# EAGLE board esq_ordenado (EAGLE 9.6.1)
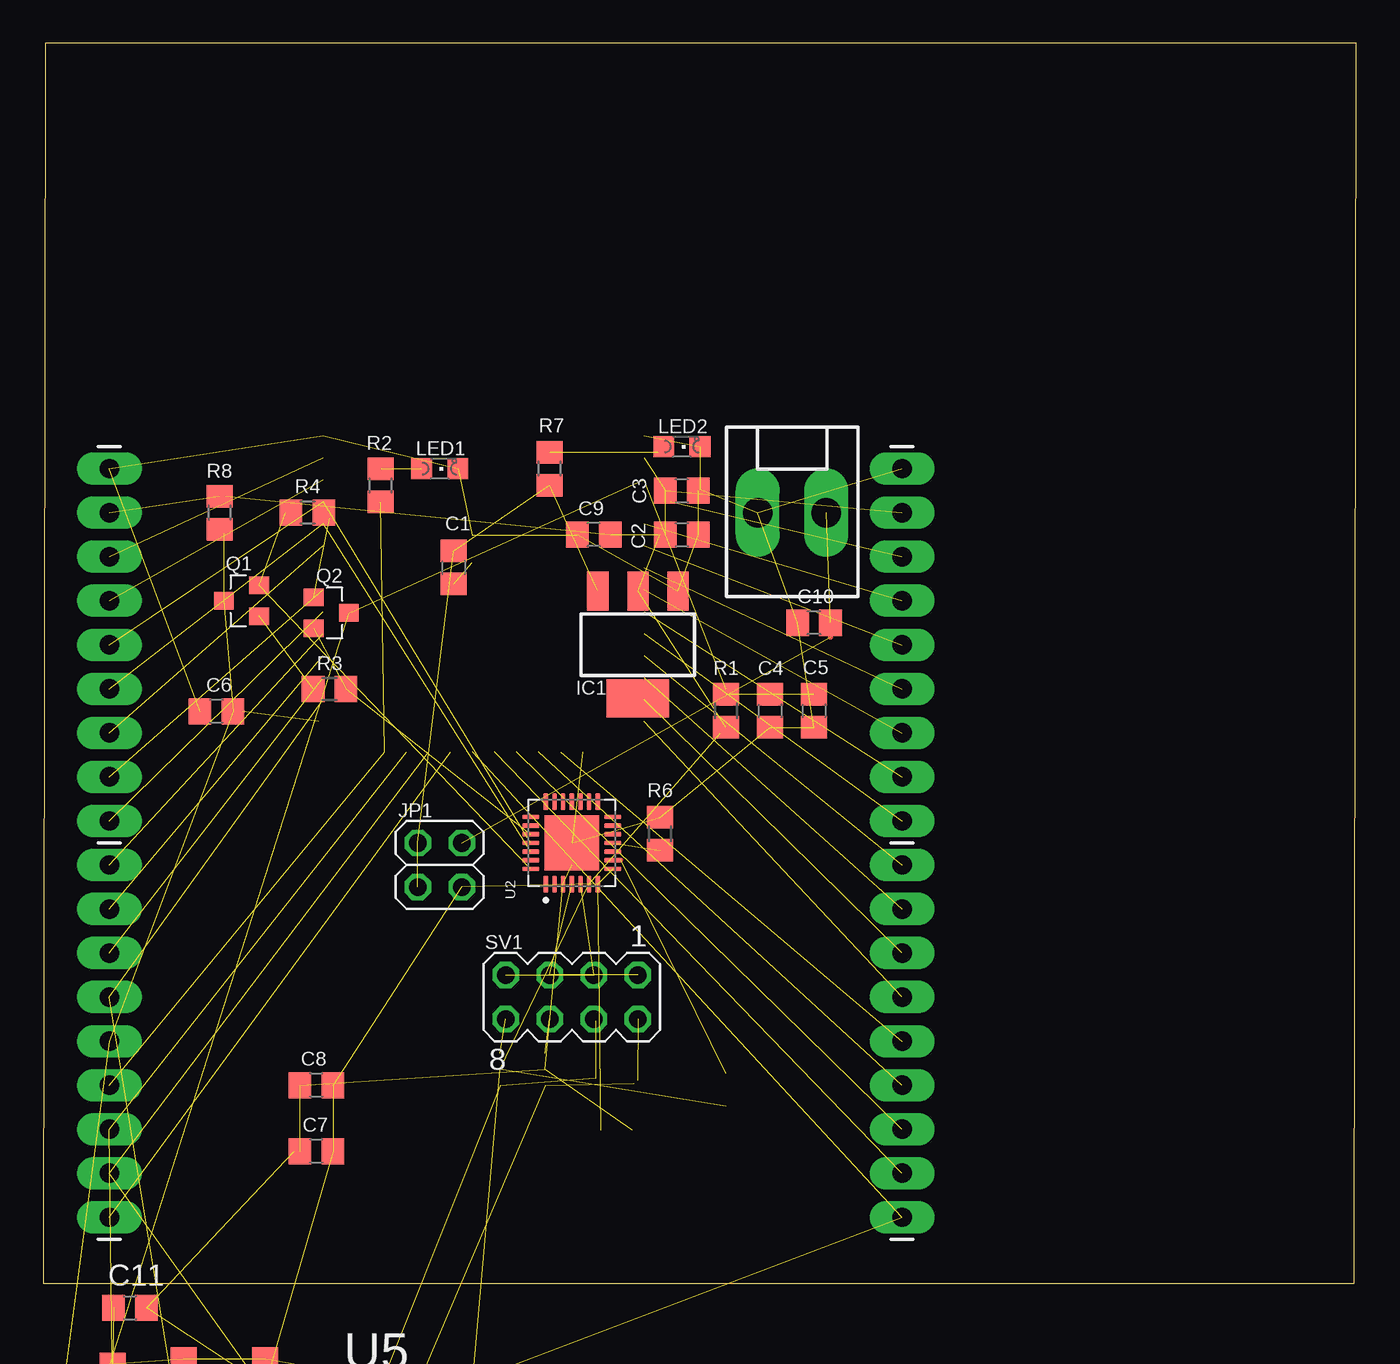
[diagram p0: board, top side]
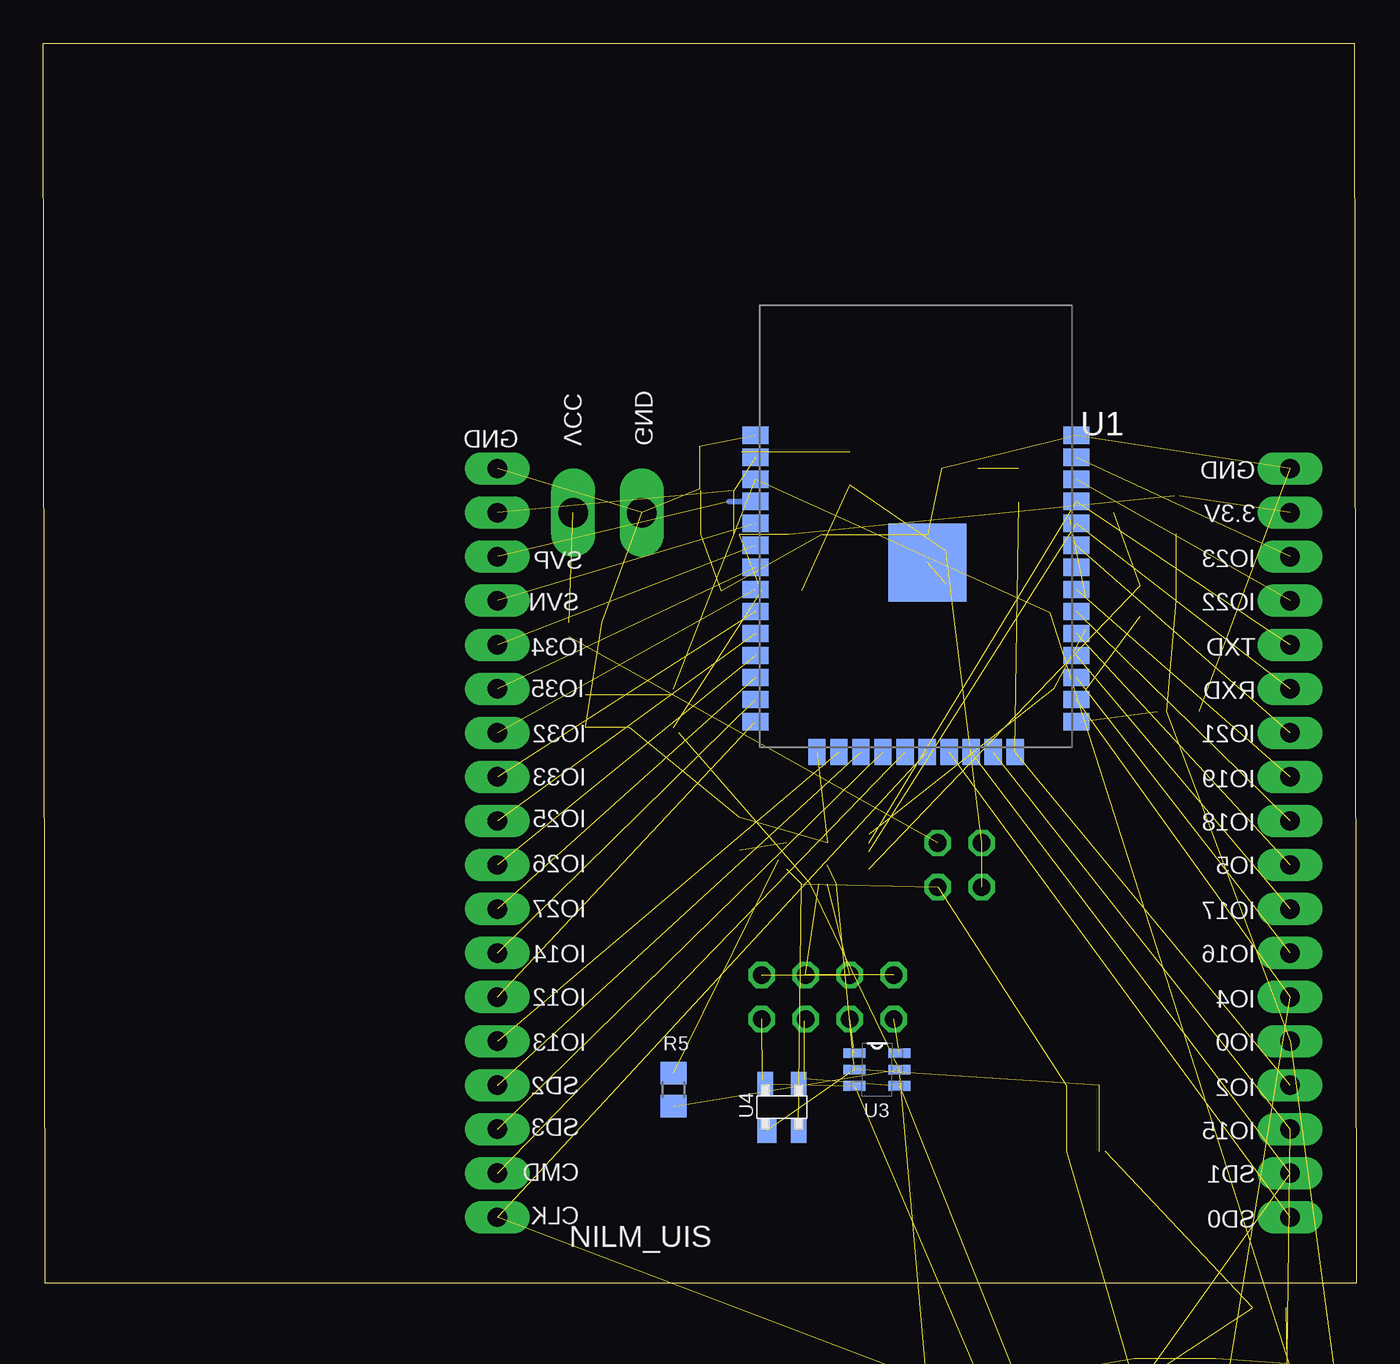
[diagram p1: board, bottom side, seen from below]

Size 75.72 x 71.52 mm. Coordinates in mm from the lower left corner, seen from the top.
Outline: 0,0 75.62,0 75.72,71.52 0.1,71.52 0,0
Copper layers (1*16): Top 0.035mm / dielectric 1.5mm / Bottom 0.035mm
Design rules "default": minimum track width 6mil, minimum drill 0.35mm, track to track 6mil, track to pad 6mil, pad to pad 6mil, via to via 6mil, smd to smd 6mil, copper to edge 40mil, drill to drill 6mil, minimum pad ring 10mil, minimum via ring 8mil, stop-mask expansion 4mil, vias tented up to drill 0mil, thermal gap 10mil

## Footprints (pad centres in the part's own frame; a part is rotated, then mirrored left to right if it is on the bottom)
C0805 = smd 1.3 x 1.5: 1 -0.95,0; 2 0.95,0
SOT223 = smd 1.219 x 2.235: 1 -2.311,-3.099; 2 0,-3.099; 3 2.311,-3.099 | smd 3.6 x 2.2: TAB 0,3.099
1X09_LONGPADS = drill 1.118 pad 1.88 long: 1 0,0; 2 2.54,0; 3 5.08,0; 4 7.62,0; 5 10.16,0; 6 12.7,0; 7 15.24,0; 8 17.78,0; 9 20.32,0
2X02 = drill 1.016 octagon: 1 -1.27,-1.27; 2 -1.27,1.27; 3 1.27,-1.27; 4 1.27,1.27
CHIPLED_0805 = smd 1.2 x 1.2: A 0,-1.05; C 0,1.05
SOT-23 = smd 1.016 x 1.143: 1 -0.889,-1.016; 2 0.889,-1.016; 3 0,1.016
R0805 = smd 1.3 x 1.5: 1 -0.95,0; 2 0.95,0
B3FS-1012P = smd 1.6 x 1.4: P1 4,-2.25; P2 -4,-2.25; P3 4,2.25; P4 -4,2.25
MA04-2 = drill 1.016 octagon: 1 -3.81,-1.27; 2 -3.81,1.27; 3 -1.27,-1.27; 4 -1.27,1.27; 5 1.27,-1.27; 6 1.27,1.27; 7 3.81,-1.27; 8 3.81,1.27
ESP-32S = smd 1.5 x 1: 1 -9.25,7; 2 -9.25,5.73; 3 -9.25,4.46; 4 -9.25,3.19; 5 -9.25,1.92; 6 -9.25,0.65; 7 -9.25,-0.62; 8 -9.25,-1.89; 9 -9.25,-3.16; 10 -9.25,-4.43; 11 -9.25,-5.7; 12 -9.25,-6.97; 13 -9.25,-8.24; 14 -9.25,-9.51; 25 9.25,-9.51; 26 9.25,-8.24; 27 9.25,-6.97; 28 9.25,-5.7; 29 9.25,-4.43; 30 9.25,-3.16; 31 9.25,-1.89; 32 9.25,-0.62; 33 9.25,0.65; 34 9.25,1.92; 35 9.25,3.19; 36 9.25,4.46; 37 9.25,5.73; 38 9.25,7 | smd 1 x 1.5: 15 -5.7,-11.25; 16 -4.43,-11.25; 17 -3.16,-11.25; 18 -1.89,-11.25; 19 -0.62,-11.25; 20 0.65,-11.25; 21 1.92,-11.25; 22 3.19,-11.25; 23 4.46,-11.25; 24 5.73,-11.25 | smd 4.5 x 4.5: GND 0.68,-0.33
QFN50P500X500X100-29N = smd 0.97 x 0.26: 1 -2.37,1.5; 2 -2.37,1; 3 -2.37,0.5; 4 -2.37,0; 5 -2.37,-0.5; 6 -2.37,-1; 7 -2.37,-1.5; 15 2.37,-1.5; 16 2.37,-1; 17 2.37,-0.5; 18 2.37,0; 19 2.37,0.5; 20 2.37,1; 21 2.37,1.5 | smd 0.26 x 0.97: 8 -1.5,-2.37; 9 -1,-2.37; 10 -0.5,-2.37; 11 0,-2.37; 12 0.5,-2.37; 13 1,-2.37; 14 1.5,-2.37; 22 1.5,2.37; 23 1,2.37; 24 0.5,2.37; 25 0,2.37; 26 -0.5,2.37; 27 -1,2.37; 28 -1.5,2.37 | smd 3.15 x 3.15: 29 0,0
SOT95P280X145-6N = smd 1.27 x 0.559: 1 -1.295,0.94; 2 -1.295,0; 3 -1.295,-0.94; 4 1.295,-0.94; 5 1.295,0; 6 1.295,0.94
SOT143 = smd 1.4 x 1.1: 1 -1.35,0.86 | smd 1.4 x 0.9: 2 -1.35,-0.96; 3 1.35,-0.96; 4 1.35,0.96
TMP275AIDR = smd 1.55 x 0.6: 1 -2.7,1.905; 2 -2.7,0.635; 3 -2.7,-0.635; 4 -2.7,-1.905; 5 2.7,-1.905; 6 2.7,-0.635; 7 2.7,0.635; 8 2.7,1.905
SOIC8_INA157U_2K5 = smd 1.55 x 0.6: P$1 -2.613,1.851; P$2 -2.613,0.605; P$3 -2.613,-0.665; P$4 -2.613,-1.935; P$5 2.848,-1.935; P$6 2.848,-0.665; P$7 2.848,0.605; P$8 2.848,1.851
MICRO_B_10118192 = smd 0.4 x 1.35: P1 -1.3,2.7; P2 -0.65,2.7; P3 0,2.7; P4 0.65,2.7; P5 1.3,2.7 | smd 2.1 x 1.6: SHEL1 -3.1,2.575; SHEL6 3.1,2.575 | smd 1.8 x 1.9: SHEL2 -3.8,0; SHEL5 3.8,0 | smd 1.9 x 1.9: SHEL3 -1.2,0; SHEL4 1.2,0
KK-156-2 = drill 1.7 pad 2.184 long: 1 -1.98,0; 2 1.98,0
KK-156-3 = drill 1.7 pad 2.184 long: 1 -3.96,0; 2 0,0; 3 3.96,0

## Placement (x,y rotation side)
C1  100uF  [C0805]  23.66,41.29 270 top
C2  0.1uF  [C0805]  36.83,43.18 0 top
C3  4.7uF  [C0805]  36.83,45.72 0 top
C4  0.1uF  [C0805]  41.91,33.02 270 top
C5  1uF  [C0805]  44.45,33.02 270 top
C6  0.1uF  [C0805]  9.99,32.99 180 top
C7  0.1uF  [C0805]  15.75,7.62 180 top
C8  1.0uF  [C0805]  15.75,11.43 180 top
C9  10uF  [C0805]  31.75,43.18 180 top
C10  10uF  [C0805]  44.45,38.1 180 top
C11  0.01uF  [C0805]  5,-1.4 0 top
C12  10nF  [C0805]  -5.2,-75.7 0 top  (outside the outline)
IC1  LM1117IMPX-3.3  [SOT223]  34.29,36.83 180 top
J1  [1X09_LONGPADS]  3.81,46.99 270 top
J2  [1X09_LONGPADS]  3.81,24.13 270 top
J5  [1X09_LONGPADS]  49.53,46.99 270 top
J6  [1X09_LONGPADS]  49.53,24.13 270 top
JP1  [2X02]  22.86,24.13 90 top
LED1  [CHIPLED_0805]  22.86,46.99 270 top
LED2  [CHIPLED_0805]  36.83,48.26 270 top
Q1  SMD-TRANSISTORS-NPN-25V-500MW(SOT-23)  [SOT-23]  11.43,39.37 90 top
Q2  SMD-TRANSISTORS-NPN-25V-500MW(SOT-23)  [SOT-23]  16.61,38.67 270 top
R1  10K  [R0805]  39.37,33.02 90 top
R2  10K  [R0805]  19.45,46.02 90 top
R3  12K  [R0805]  16.51,34.29 0 top
R4  12K  [R0805]  15.24,44.45 180 top
R5  4.7K  [R0805]  39.37,11.17 90 bottom
R6  10K  [R0805]  35.56,25.93 270 top
R7  10K  [R0805]  29.21,46.99 90 top
R8  10K  [R0805]  10.16,44.45 270 top
R9  5K  [R0805]  12.8,-5.3 270 top  (outside the outline)
R10  5K  [R0805]  8.1,-5.3 270 top  (outside the outline)
R11  5K  [R0805]  4,-5.6 270 top  (outside the outline)
R12  5K  [R0805]  -5.2,-40.3 0 top  (outside the outline)
R13  5K  [R0805]  -5.2,-46.5 0 top  (outside the outline)
R14  1M  [R0805]  -5.2,-69.5 0 top  (outside the outline)
S_IO0  SWITCH_OMRON_B3FS-1012P  [B3FS-1012P]  -12.1,-73.1 0 top  (outside the outline)
SV1  [MA04-2]  30.48,16.51 180 top
U1  ESP-32S  [ESP-32S]  25.4,41.91 0 bottom
U2  CP2102-GM  [QFN50P500X500X100-29N]  30.48,25.4 90 top
U3  TPD2S017DBVR  [SOT95P280X145-6N]  27.64,12.33 0 bottom
U4  SP0503BAHT  [SOT143]  33.12,10.16 90 bottom
U5  TMP275AIDR  [TMP275AIDR]  22,-8.3 0 top  (outside the outline)
U6  INA157U/2K5  [SOIC8_INA157U_2K5]  14,-29.2 0 top  (outside the outline)
U$1  MICRO_USB_B-AMPHENOL(10118192)  [MICRO_B_10118192]  -2.2,-64.4 0 top  (outside the outline)
U$2  SWITCH_OMRON_B3FS-1012P  [B3FS-1012P]  -15,-60.8 90 top  (outside the outline)
X1  [KK-156-2]  43.18,44.45 0 top
X3  [KK-156-3]  1.1,-54.6 0 top  (outside the outline)

## Library data of the parts
C1-C12 R1-R14 = resistor
IC1 = lm1117
J1 J2 J5 J6 = SparkFun-Connectors
JP1 = pinhead
LED1 LED2 = adafruit
Q1 Q2 = SMD-TRANSISTORS-NPN-25V-500MW_SOT-23_; AVAILABILITY: Unavailable; MF: Recom Power; MP: S8050; PACKAGE: SOT-23 Micro Commercial; PRICE: None
S_IO0 U$2 = switch_B3FS-1012P
SV1 = con-lstb; OC_FARNELL: unknown; OC_NEWARK: unknown
U1 = esp32
U2 = CP2102-GM; AVAILABILITY: Unavailable; DESCRIPTION: Microcontroller Solutions - Interface Products USB to UART Bdg Chip; MF: Silicon Labs; MP: CP2102-GM; PACKAGE: QFN-28 Silicon Labs; PRICE: None
U3 = TPD2S017DBVR; DESCRIPTION: 2-Channel Ultra Low Clamp Voltage ESD Solution with Series-Resistor Isolation 6-SOT-23 -40 to 85; DIGI-KEY_PART_NUMBER: 296-25216-1-ND; DIGI-KEY_PURCHASE_URL: https://www.digikey.com/product-detail/en/texas-instruments/TPD2S017DBVR/296-25216-1-ND/2172703?utm_source=snapeda&utm_medium=aggregator&utm_campaign=symbol; MF: Texas Instruments; MP: TPD2S017DBVR; PACKAGE: SOT-23-6 Texas Instruments
U4 = SP0503BAHT; AVAILABILITY: Unavailable; DESCRIPTION: Tvs Diode 5.5vwm 8.5vc Sot143; MF: Littelfuse Inc.; MP: SP0503BAHT; PACKAGE: SOT-143 Littelfuse; PRICE: None
U5 = Sensor; CREATED_BY: PCBLayout.com; DIGIKEY_PART_NUMBER: 296-39296-2-ND; MANUFACTURER: Texas Instruments; MPN: TMP275AIDR; PACKAGE: 8-SOIC
U6 = INA157U_2K5
U$1 = usb_microB_10118192
X1 X3 = con-molex; MF: MOLEX; OC_FARNELL: unknown; OC_NEWARK: unknown

## Nets
3.3V: C2.1 C3.1 C9.1 C11.1 IC1.2 J1.2 J5.2 R1.1 R5.1 R8.1 R9.1 R10.1 R11.1 U1.2 U2.6 U3.5 U5.8
CLK [PINES_ESP]: J6.9 R10.2 U1.20 U5.2
CMD [PINES_ESP]: J6.8 U1.19
D+: SV1.1 SV1.5 U2.4
D+_OUT: SV1.2 U3.3 U4.4 U$1.P3
D+IN: SV1.6 U3.1
D-: SV1.3 SV1.7 U2.5
D-_OUT: SV1.4 U3.4 U4.3 U$1.P2
D-IN: SV1.8 U3.6
DTR_CP: Q1.2 R4.2 U2.28
ENABLE [PINES_ESP]: C4.1 C5.1 Q2.3 R1.2 U1.3 U$2.P1 U$2.P2
GND: C1.2 C2.2 C3.2 C4.2 C5.2 C6.2 C7.2 C8.2 C9.2 C10.2 C11.2 C12.2 IC1.1 J1.1 J5.1 LED1.C LED2.C R6.1 R12.1 R14.1 S_IO0.P3 S_IO0.P4 U1.1 U1.15 U1.38 U1.GND U2.3 U2.29 U3.2 U4.1 U5.4 U5.5 U5.6 U5.7 U$1.P4 U$1.P5 U$2.P3 U$2.P4 X1.1 X3.2
IO0 [PINES_ESP]: C6.1 J2.5 Q1.3 R8.2 S_IO0.P1 S_IO0.P2 U1.25
IO2 [PINES_ESP]: J2.6 R2.1 U1.24
IO4 [PINES_ESP]: J2.4 U1.26 U6.P$3
IO5 [PINES_ESP]: J2.1 U1.29
IO12 [PINES_ESP]: J6.4 U1.14
IO13 [PINES_ESP]: J6.5 U1.16
IO14 [PINES_ESP]: J6.3 U1.13
IO15 [PINES_ESP]: J2.7 R11.2 U1.23 U5.3
IO16 [PINES_ESP]: J2.3 U1.27
IO17 [PINES_ESP]: J2.2 U1.28
IO18 [PINES_ESP]: J1.9 U1.30
IO19 [PINES_ESP]: J1.8 U1.31
IO21 [PINES_ESP]: J1.7 U1.33
IO22 [PINES_ESP]: J1.4 U1.36
IO23 [PINES_ESP]: J1.3 U1.37
IO25 [PINES_ESP]: J5.9 U1.10
IO26 [PINES_ESP]: J6.1 U1.11
IO27 [PINES_ESP]: J6.2 U1.12
IO32 [PINES_ESP]: J5.7 U1.8
IO33 [PINES_ESP]: J5.8 U1.9
IO34 [PINES_ESP]: J5.5 U1.6
IO35 [PINES_ESP]: J5.6 U1.7
N$2: LED1.A R2.2
N$3: Q1.1 R3.1
N$4: Q2.1 R4.1
N$5: R5.2 U2.9
N$6: LED2.A R7.2
N$7: C12.1 R14.2 U$1.SHEL1 U$1.SHEL2 U$1.SHEL3 U$1.SHEL4 U$1.SHEL5 U$1.SHEL6
N$11: R12.2 R13.1 U6.P$2
N$12: R13.2 U6.P$6
RTS_CP: Q2.2 R3.2 U2.24
RXD_ESP [PINES_ESP]: J1.6 U1.34 U2.26
SD0 [PINES_ESP]: J2.9 U1.21
SD1 [PINES_ESP]: J2.8 R9.2 U1.22 U5.1
SD2 [PINES_ESP]: J6.6 U1.17
SD3 [PINES_ESP]: J6.7 U1.18
SUSPEND-: R6.2 U2.11
SVN [PINES_ESP]: J5.4 U1.5
SVP [PINES_ESP]: J5.3 U1.4
TXD_ESP [PINES_ESP]: J1.5 U1.35 U2.25
V+: U6.P$7 X3.1
V-: U6.P$4 X3.3
VCC: C10.1 JP1.3 X1.2
VIN: C1.1 IC1.3 JP1.2 JP1.4 R7.1
VUSB: C7.1 C8.1 JP1.1 U2.7 U2.8 U4.2 U$1.P1

## Tracks (layer width: path | path; a pad name or v marks a point on that pad's centre or on a via)
3.3V  (16 unrouted)
  Top 0.305: 35.56,43.18 C2.1 | R1.1 39.05,31.75 | R8.1 10.48,45.4
  Bottom 0.254: 34.95,47.94 U1.2
CLK  (3 unrouted)
CMD  (1 unrouted)
D+  (2 unrouted)
D+_OUT  (3 unrouted)
  Bottom 0.254: U4.4 34.28,11.71 | SV1.2
D+IN  (1 unrouted)
D-  (2 unrouted)
D-_OUT  (3 unrouted)
  Bottom 0.254: U4.3 31.86,11.81 | 31.86,15.13 SV1.4
D-IN  (1 unrouted)
DTR_CP  (2 unrouted)
  Top 0.305: 13.97,44.45 R4.2
ENABLE  (6 unrouted)
  Top 0.305: 39.37,34.29 R1.2 | C5.1 44.77,33.97
GND  (39 unrouted)
  Top 0.254: 30.48,24.13 U2.29 | C7.2 14.48,7.62
  Top 0.305: C3.2 37.88,45.82 | 30.77,43.15 C9.2
  Bottom 0.254: 24.72,41.91 U1.GND
  Bottom 0.305: 24.72,41.91 24.72,43.15 | U1.GND 24.72,41.7 24.66,41.76 24.66,41.82
IO0  (6 unrouted)
  Top 0.305: R8.2 10.41,43.25 | 11.46,32.99 C6.1
  Bottom 0.305: U1.25 15.89,32.4
IO2  (2 unrouted)
IO4  (2 unrouted)
IO5  (1 unrouted)
IO12  (1 unrouted)
IO13  (1 unrouted)
IO14  (1 unrouted)
IO15  (3 unrouted)
IO16  (1 unrouted)
IO17  (1 unrouted)
IO18  (1 unrouted)
IO19  (1 unrouted)
IO21  (1 unrouted)
IO22  (1 unrouted)
IO23  (1 unrouted)
IO25  (1 unrouted)
IO26  (1 unrouted)
IO27  (1 unrouted)
IO32  (1 unrouted)
IO33  (1 unrouted)
IO34  (1 unrouted)
IO35  (1 unrouted)
N$2  (1 unrouted)
  Top 0.305: R2.2 19.47,46.99
N$3  (1 unrouted)
N$4  (1 unrouted)
  Top 0.305: 16.51,44.13 R4.1
N$5  (1 unrouted)
  Top 0.254: U2.9 33.31,24.41
N$6  (1 unrouted)
  Top 0.305: LED2.A 35.46,47.94
N$7  (7 unrouted)
N$11  (2 unrouted)
N$12  (1 unrouted)
RTS_CP  (2 unrouted)
RXD_ESP  (2 unrouted)
SD0  (1 unrouted)
SD1  (3 unrouted)
SD2  (1 unrouted)
SD3  (1 unrouted)
SUSPEND-  (1 unrouted)
SVN  (1 unrouted)
SVP  (1 unrouted)
  Bottom 0.305: U1.4 36.18,45.1
TXD_ESP  (2 unrouted)
V+  (1 unrouted)
V-  (1 unrouted)
VCC  (2 unrouted)
  Top 0.305: 45.4,37.28 C10.1
VIN  (4 unrouted)
  Top 0.305: IC1.3 31.95,39.95
VUSB  (6 unrouted)

## Text on the board
bNames: GND | VCC | GND | GND | 3.3V | IO23 | SVP | IO22 | SVN | TXD | IO34 | RXD | IO35 | IO21 | IO32 | IO19 | IO33 | IO18 | IO25 | IO5 | IO26 | IO17 | IO27 | IO16 | IO14 | IO4 | IO12 | IO0 | IO13 | IO2 | SD2 | IO15 | SD3 | SD1 | CMD | SD0 | CLK | NILM_UIS